# Altium PCB УШЯИ 758727.205-2.PcbDoc (part 2 of 3)
Units mm, origin at the board's own origin, x right, y up, seen from the top; angles counter-clockwise.
Board outline 230 x 150 mm, 2 copper layers (Top Layer, Bottom Layer), stack 1.57 mm thick; 340 components, 190 nets, 1058 pads, 246 vias.
Unrouted connection lines stored in the file: 2.
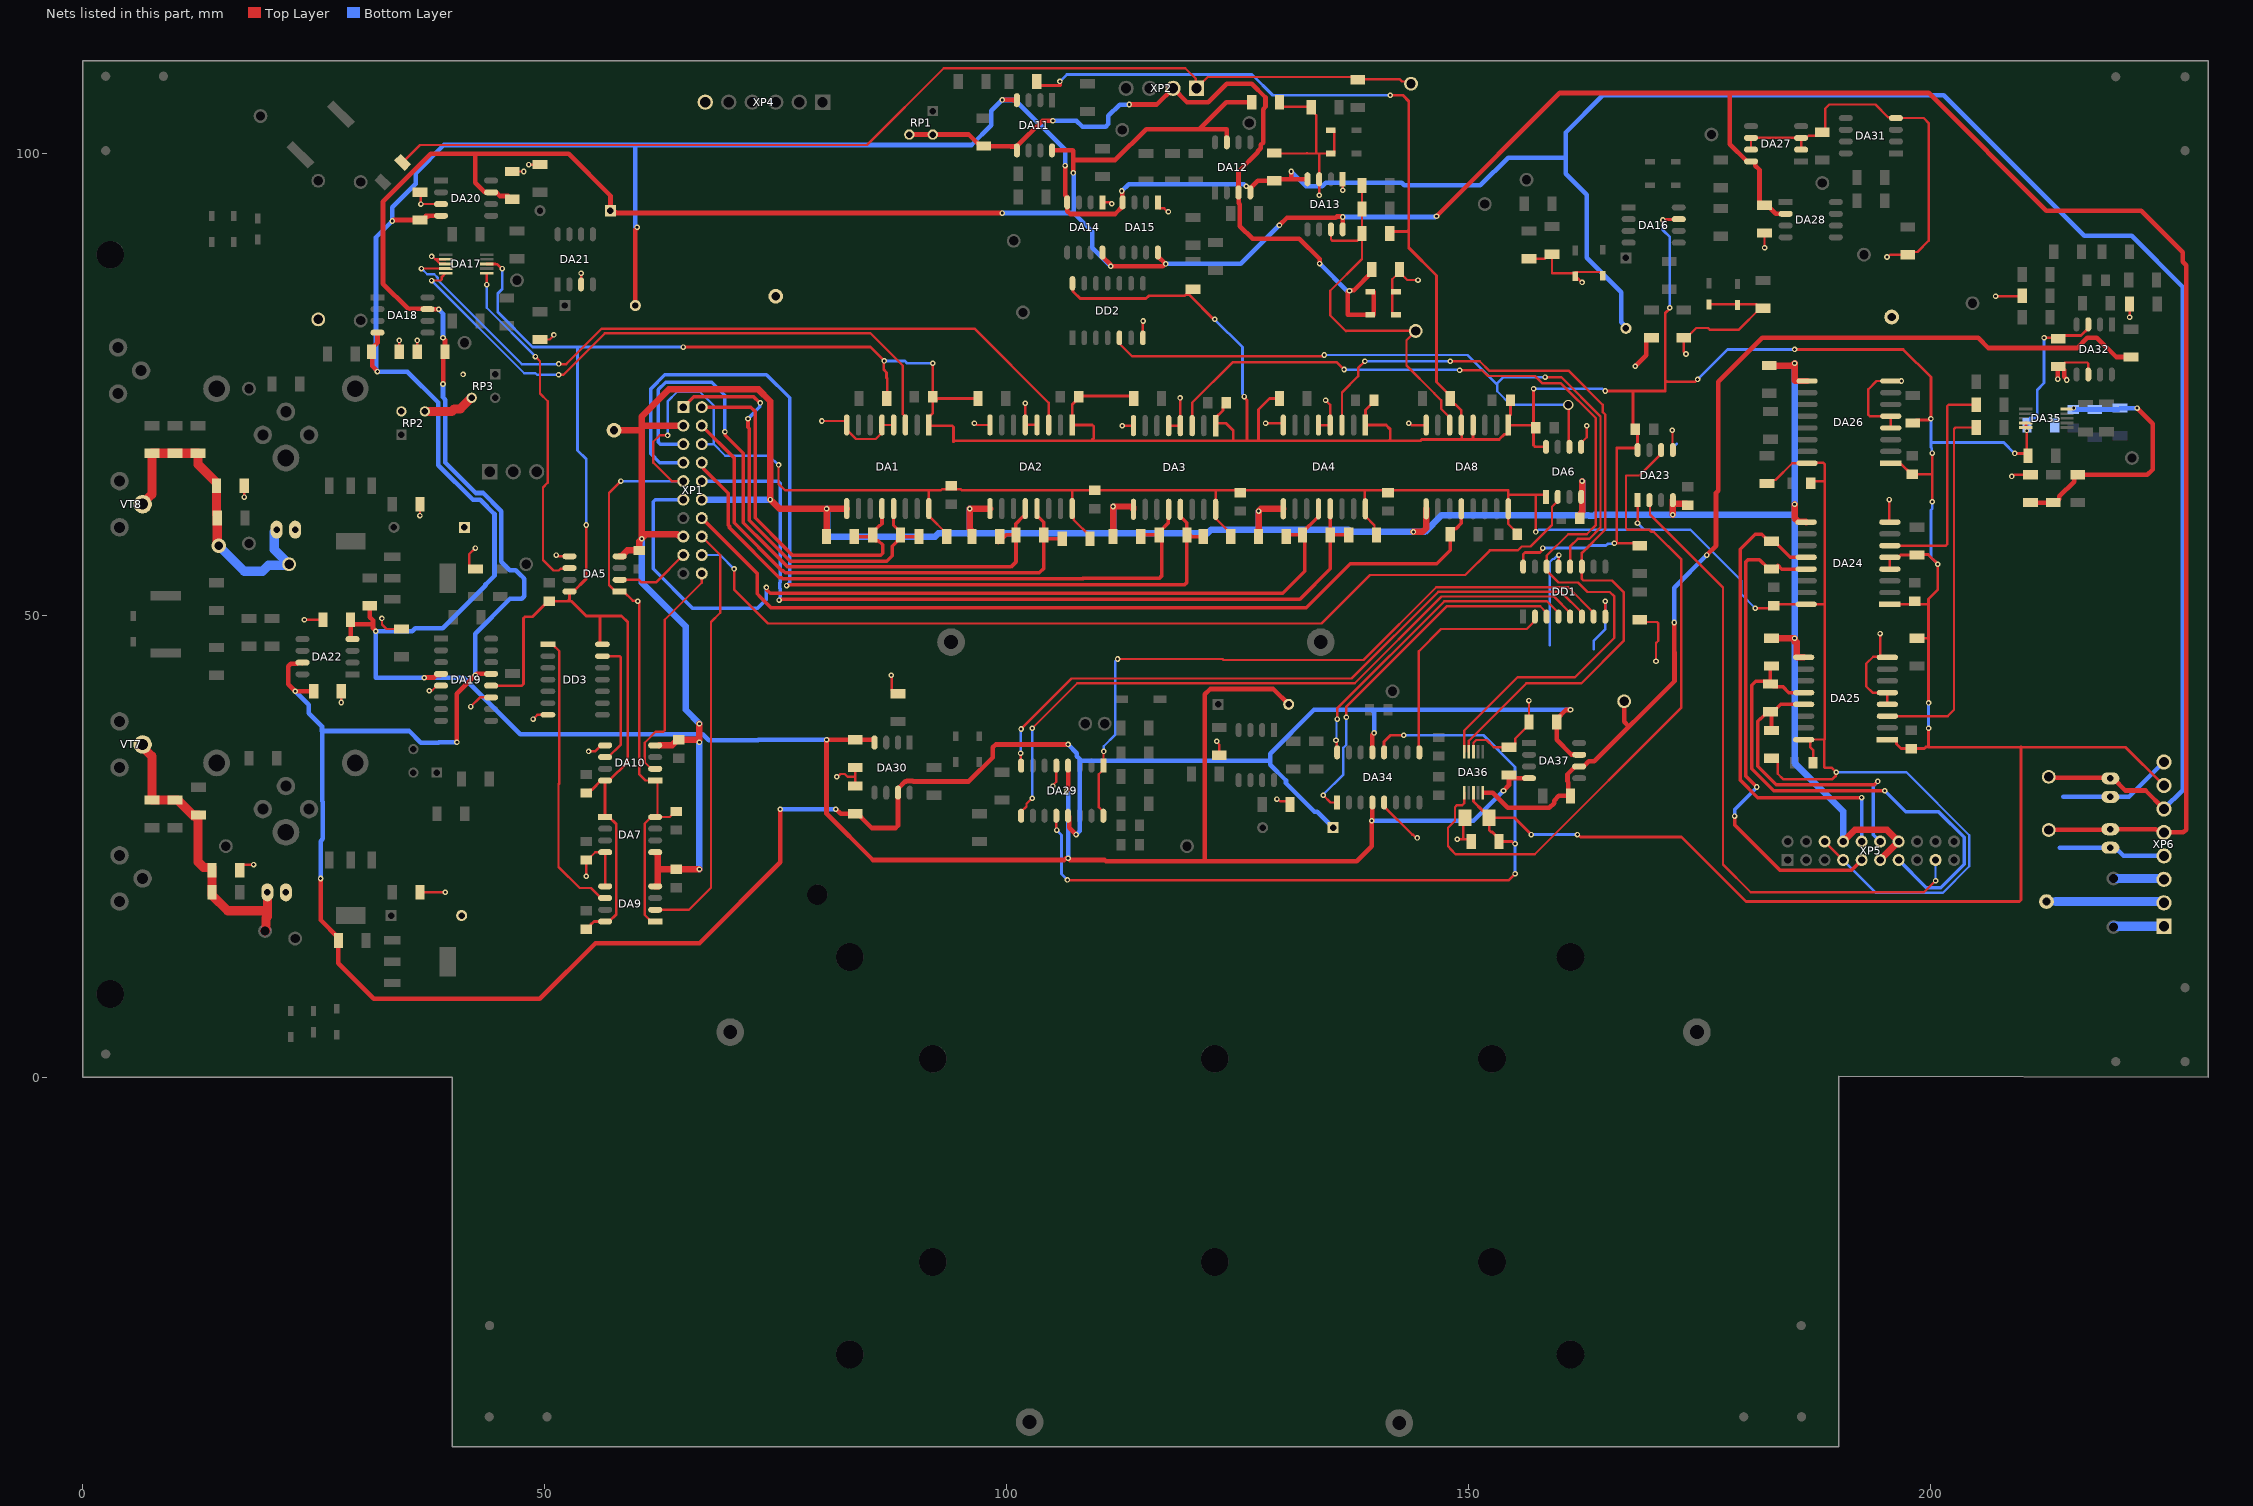
[diagram p2: the nets of this part, all layers, seen from the top]

## Via types
v1: diameter 0.6, hole 0.3, Top Layer to Bottom Layer, 241 vias
v2: diameter 0.5, hole 0.3, Top Layer to Bottom Layer, 3 vias
v3: diameter 1.1, hole 0.8, Top Layer to Bottom Layer, 1 vias
v4: diameter 1.6, hole 0.9, Top Layer to Bottom Layer, 1 vias

## Nets (pads, with @x,y where several pads share a name; then routed paths per layer and width w, separated by ;. In a path a pad name is that pad's centre, name@x,y a point inside that pad or via, vN(x,y) a via of type N, cw(c..) or ccw(c..) an arc to the next point about the centre after c; other vN are vias at no path point) (continued)
+3.3Vn: C1.2 C2.2 C3.2 C4.2 C11.1 C12.2 C53.2 C54.2 C55.2 DA1.16 DA2.16 DA3.16 DA4.16 DA5.1 DA6.1 DA7.8 DA8.16 DA9.1 DA10.1 DA23.1 DA24.16 DA25.16 DA26.16 R1.1 R3.1 R5.1 R7.1 R67.2 R68.2 XP1.6 XP1.9 XP5.6 XP5.7 | length 347.3
  Top Layer w0.254: v1(58.25,64.5) 56.967,63.217 56.967,53.252 57.669,52.55 DA5.1@58.106,52.55 58.544,52.55 59.528,51.566 60.009,51.566 v1(60.075,51.5) ; 60.25,32.75 60.905,32.095 DA10.1@61.962,32.095 ; 60.25,32.869 v1@60.25,51.5 ; DA9.1@61.962,16.845 61.525,16.845 60.823,17.547 60.823,27.453 61.395,28.026 DA7.8@61.974,28.026 ; DA7.8@61.962,28.155 DA7.8@62.212,28.155 ; DA10.1@62.014,32.095 62.212,31.897 DA7.8@62.212,28.155 ; v1(63.3,69.445) 62.445,69.445 61.75,68.75 61.75,66.5 63.75,64.5 XP1.9@65,64.5 ; C11.1@64.25,28.75 64.125,28.75 63.53,28.155 DA7.8@62.212,28.155 ; v1(75.309,66.25) 75.309,64.191 76,63.5 91.574,63.5 ; R1.1@93.5,58.5 93.5,58.8 91.574,60.726 DA1.16@91.574,61.523 91.574,63.5 ; C1.2@94,64 C1.2@94.373,63.627 ; 107,63.5 107.082,63.418 DA2.16@107.082,61.523 ; DA2.16@107.25,61.25 107.25,60.3 109,58.55 R3.1@109,58.25 ; DA3.16@122.6,61.444 122.6,63.4 122.5,63.5 ; DA3.16@122.663,61.413 122.663,60.387 124.25,58.8 R5.1@124.25,58.5 ; R7.1@140.25,58.5 139.797,58.953 139.797,59.703 138.81,60.69 DA4.16@138.81,61.5 138.75,61.56 138.75,63.5 ; C12.2@155.25,58.75 155.25,58.875 154.27,59.855 DA8.16@154.27,61.5 154.27,63.026 ; v1(157.25,59) 157.25,63 ; DA6.1@158.345,62.788 158.345,62.828 158.147,63.026 154.27,63.026 ; v1(168.25,59.952) 168.25,60 168.263,60.013 DA23.1@168.263,62.438 ; v1(181,50.75) 182.871,50.75 C53.2@183,50.879 ; R68.2@182.5,64.25 182.873,64.623 183.176,64.623 184.993,66.44 DA26.16@186.003,66.44 ; R67.2@182.75,34.5 183.05,34.5 183.423,34.127 183.423,32.827 184,32.25 189.357,32.25 189.684,32.576 189.684,32.934 v1(189.75,33) 189.248,33.502 189.246,33.5 188.5,33.5 188.47,33.53 188.47,36.53 DA25.16@186.81,36.53 ; C53.2@183,51 183.17,51.17 DA24.16@186.5,51.17 188.42,51.17 188.5,51.25 ; DA25.16@186.23,36.53 DA25.16@186.81,36.53 ; DA26.16@186.601,66.44 187.19,66.44 187.25,66.5 188.351,66.5 188.5,66.351 188.5,64.5 ; C55.2@187,64.25 187.25,64.5 188.5,64.5 ; C54.2@187.25,34 187.25,35.389 186.961,35.678 186.961,36.379 DA25.16@186.81,36.53 ; XP5.6@188.5,25.5 XP5.7@190.5,23.5 ; 188.5,36.53 188.5,51.25 ; 91.574,63.5 92.867,63.5 92.994,63.627 C1.2@94.373,63.627 ; C1.2@94.373,63.627 95.006,63.627 95.133,63.5 103.488,63.5 C2.2@109.5,63.5 122.5,63.5 ; 122.5,63.5 138.75,63.5 ; 138.75,63.5 154.25,63.5 154.27,63.48 154.27,63.026 ; 188.5,51.25 188.5,64.5
  Bottom Layer w0.254: v1(58.25,64.5) XP1.9@65,64.5 ; v1(63.3,69.445) 63.3,73.127 64.35,74.177 66.775,74.177 68.286,72.666 68.286,68.5 ; XP1.6@67,68.5 68.286,68.5 ; v1(75.309,66.25) 74.309,67.25 69.536,67.25 68.286,68.5 ; v1(157.25,59) 157.322,59 157.572,59.25 168.952,59.25 ; v1(168.25,59.952) 168.952,59.25 ; v1(181,50.75) 179.473,52.277 179.473,53.734 173.957,59.25 168.952,59.25 ; v1(189.75,33) 197.345,33 204.158,26.187 204.158,22.813 201.287,19.942 194.058,19.942 XP5.7@190.5,23.5
+5V: C5.2 C6.2 C7.2 C8.2 C13.1 C14.1 C16.2 C19.1 C20.1 C56.1 C57.2 C58.2 C59.2 C88.1 C94.2 C95.1 C97.1 DA1.1 DA2.1 DA3.1 DA4.1 DA5.8 DA6.8 DA7.1 DA8.1 DA8.4 DA8.5 DA9.8 DA10.8 DA16.7 DA17.8 DA19.12 DA23.8 DA24.1 DA24.4 DA24.5 DA25.1 DA26.1 DA29.12 DA32.3 DA34.12 DA35.9 DA35.10 DA36.8 DD1.16 DD2.14 DD3.14 R13.1 R14.1 R15.1 R16.1 R18.1 R19.2 R27.2 R32.2 R33.1 R72.1 R73.1 R74.1 R101.2 XP6.7 | length 795.3
  Top Layer w0.3: DA17.8@43.725,88 44.666,88 44.693,87.973 44.852,87.973 45.325,87.5 v1(45.406,87.5) ; DA19.12@44.212,42.365 47.53,42.365 47.71,42.544 47.71,44.334 47.706,44.338 47.706,49.649 47.882,49.825 48.7,49.825 50.375,51.5 C13.1@50.5,51.5 52.5,51.5 ; DA5.8@52.682,52.55 52.682,51.682 52.5,51.5 ; DA5.8@52.75,52.5 53.07,52.5 54.5,53.93 v1(54.5,59.75) ; C19.1@54.5,16 54.625,16 54.975,16.35 54.975,16.494 55.326,16.845 DA9.8@56.538,16.845 56.975,16.845 57.75,17.619 57.75,27.381 56.975,28.155 DA7.1@56.538,28.155 56.538,31.595 DA10.8@56.538,32.095 ; C20.1@54.5,30.75 54.625,30.75 C20.1@54.75,30.875 ; C20.1@54.75,30.75 C20.1@54.75,30.875 ; 56,49.75 56,46.969 56.139,46.83 DD3.14@56.25,46.83 ; v1(65,79) 85.25,79 v1(86.75,77.5) 86.693,77.443 86.693,76.557 87,76.25 87,75.669 87.069,75.599 R13.1@87.069,72.782 ; DA1.1@91.5,70.75 91.5,71.364 92,71.864 C5.2@92,73.602 v1(92,77.25) ; DA1.1@91.574,70.579 91.574,70.859 91.715,71 91.715,70.5 94.074,70.5 94.25,70.324 94.25,68.75 ; DA1.1@91.628,70.579 DA1.1@91.628,70.75 ; C5.2@92.414,73.257 92.584,73.427 R14.1@96.898,73.427 ; 94.25,68.865 126,68.865 ; R19.2@103.305,107.3 105.805,107.3 105.805,107.695 v1(105.75,107.75) ; DA29.12@105.365,28.288 105.365,26.793 v1(105.416,26.742) ; v1(106.566,21.346) 106.612,21.3 154.3,21.3 v1(155,22) ; DD2.14@107.166,85.45 107.166,85.031 107.948,84.25 115.076,84.25 115.376,84.55 119.254,84.55 119.402,84.699 119.702,84.699 v1@122.497,81.904 ; 109.25,69 109.421,69.171 109.421,70.404 109.245,70.579 DA2.1@107.082,70.579 107.082,72.768 107.791,73.477 107.791,73.705 113.3,73.705 113.577,73.427 R15.1@113.741,73.427 ; C7.2@123.75,73 C7.2@123.75,73.125 ; C7.2@124,73 123.875,73 123.4,72.525 123.4,72.158 122.6,71.358 DA3.1@122.6,70.5 122.6,70.609 122.741,70.75 123.75,70.75 124.5,70 124.5,69 ; v1@125.75,73.5 126,73.25 126,68.865 ; R16.1@129.499,73.427 128.427,73.427 127.25,72.25 127.25,68.865 ; DA4.1@138.81,70.556 141.056,70.556 141.5,70.112 141.5,69 141.365,68.865 127.25,68.865 ; DA4.1@138.81,71 138.81,72.185 139.625,73 C8.2@140,73 ; DA34.12@140.832,35.15 140.832,36.301 141.532,37 v1(142.952,37) ; R27.2@141.446,91.299 141.647,91.5 143.324,91.5 143.5,91.676 ; 141.5,68.865 144.75,68.865 144.885,69 149.25,69 ; v1(141.5,106.25) 142.855,106.25 143.5,105.605 143.5,91.676 ; R18.1@148,73 148,73.708 146.5,75.208 146.5,86.75 143.5,89.75 143.5,91.676 ; R18.1@148,73.108 148.331,72.777 148.568,72.777 149.19,72.155 DA8.5@149.19,70.556 149.244,70.502 149.244,69.006 149.25,69 ; DA8.4@150.46,70.556 150.46,69.04 150.5,69 ; DA36.8@150.5,30.775 150.5,29.834 151.501,28.833 151.65,28.833 152.2,28.283 C95.1@152.2,28.083 ; DA8.1@154.25,70.75 154.25,71.394 154.5,71.644 C16.2@154.5,73.25 ; DA8.1@154.257,70.543 155.25,70.543 ; DA8.1@154.27,70.556 154.27,69.698 154.129,69.557 153.836,69.557 153.279,69 150.5,69 ; v1(155,25.25) 154.919,25.25 154.669,25.5 C97.1@153.25,25.5 153.25,25.8 152.531,26.519 152.412,26.519 152.2,26.731 C95.1@152.2,28.083 ; 155.263,70.543 C14.1@157,70.543 ; DD1.16@155.88,55.25 155.88,56.549 156.1,56.768 157.674,56.768 157.85,56.944 157.85,57.019 158,57.169 v1(158,57.25) ; v1(156.75,26.25) 154.917,28.083 C95.1@152.2,28.083 ; v1(157,74.5) C14.1@157,70.543 ; C14.1@157.25,70.5 157.207,70.543 C14.1@157,70.543 ; DA6.8@158.345,68.212 157.176,68.212 157,68.388 C14.1@157,70.543 ; v1(161.75,26.25) 161.826,26.25 162.076,26 173,26 180,19 209.574,19 209.75,19.176 209.75,35.75 ; v1(164.75,74.25) 167.75,74.25 ; v1(165.752,57.775) v1@166,57.775 ; 166,68.075 v1@166,57.775 ; 166.025,68.075 168.101,68.075 DA23.8@168.263,67.913 ; C56.1@167.9,70.175 C56.1@167.925,70.175 ; C56.1@168,70.125 167.75,70.375 167.75,74.25 ; C56.1@168,70.175 168.263,69.912 DA23.8@168.263,67.913 ; DA23.8@168.263,67.862 DA23.8@168.263,67.913 ; R33.1@168.5,57.5 168.225,57.775 v1@166,57.775 ; v1(171,92.75) 171.046,92.796 172.665,92.796 DA16.7@172.712,92.843 ; v1(171.75,83.25) 171.75,83.174 171.242,82.666 171.242,75.434 ; v1(174.75,75.5) 174.508,75.258 171.418,75.258 171.242,75.434 ; v1(185.25,78.75) 197,78.75 200,75.75 v1(200,71.25) 199.919,71.25 199.794,71.125 198.375,71.125 R74.1@198.025,70.775 ; DA24.1@195.556,51.17 199.67,51.17 199.75,51.25 ; DA24.4@195.556,54.98 DA24.5@195.556,56.25 196.49,56.25 196.74,56.5 R72.1@198.5,56.5 198.55,56.55 199.7,56.55 v1(200.75,55.5) 200.75,52.75 199.75,51.75 199.75,51.25 ; DA26.1@195.657,66.44 196.515,66.44 196.656,66.299 196.826,66.299 197.875,65.25 200.125,65.25 200.15,65.275 ; DA25.1@195.75,36.5 196.174,36.5 196.285,36.389 196.285,36.04 196.775,35.55 C58.2@197.85,35.55 199.3,35.55 199.5,35.75 199.75,35.75 v1(199.75,37.75) ; R73.1@198.5,47.5 199.75,47.5 ; 199.75,35.7 221.076,35.7 225,31.776 XP6.7@225,31.75 ; v1(199.75,40.5) 199.75,47.5 ; v1(200.15,62.275) 200.15,65.25 ; v1(209.064,67.5) R101.2@210.25,67.5 ; DA35.9@210.275,70.796 DA35.10@210.275,70.296 210.375,70.296 v2(210.375,69.95) 210.375,67.625 R101.2@210.345,67.595 ; v1(212.25,80) 213.666,80 C88.1@213.768,79.897 214.118,80.247 216.252,80.247 217.029,81.024 DA32.3@217.029,81.462 ; 52.5,51.5 52.9,51.5 54.5,49.9 58.324,49.9 59,49.224 59,34.12 56.975,32.095 DA10.8@56.538,32.095 ; C20.1@54.75,30.875 54.975,31.1 55.105,31.1 56.1,32.095 DA10.8@56.538,32.095 ; 126,68.865 127.25,68.865 ; 149.25,69 150.5,69 ; 167.75,74.25 171.25,74.25 171.242,74.258 171.242,75.434 ; 199.75,47.5 199.75,51.25 ; 200.15,65.25 v1(200.15,67.525) 200.15,65.25 ; R101.2@210.25,67.5 R101.2@210.5,67.25 210.5,67.441 R101.2@210.345,67.595 ; R101.2@210.25,67.5 R101.2@210.345,67.595
  Bottom Layer w0.3: v1(45.406,87.5) 45.406,85.298 44.925,84.817 44.925,82.796 48.701,79.02 52.624,79.02 52.644,79 v1(65,79) ; 53.555,78.894 53.555,67.815 54.5,66.87 v1(54.5,59.75) ; v1(86.75,77.5) 88.971,77.5 89.221,77.25 v1(92,77.25) ; v1(105.416,26.742) 105.416,26.72 105.935,26.201 105.935,21.977 v1(106.566,21.346) ; v1(105.75,107.75) 106.5,108.5 126.528,108.5 128.778,106.25 v1(141.5,106.25) ; v1(122.5,82) 125.5,79 125.5,73.93 125.701,73.729 v1(125.701,73.648) ; v1(142.952,37) 151.571,37 155,33.571 v1(155,25.25) v1(155,22) ; v1(156.75,26.25) v1(161.75,26.25) ; v1(157,74.5) 164.419,74.5 164.669,74.25 v1(164.75,74.25) ; v1(158,57.25) 162.779,57.25 163.054,57.525 164.852,57.525 165.045,57.718 165.695,57.718 v1(165.752,57.775) ; v1(171,92.75) 171,91.646 171.75,90.896 v1(171.75,83.25) ; v1(174.75,75.5) 178,78.75 v1(185.25,78.75) ; v1(199.75,37.75) v1(199.75,40.5) ; v1(200,71.25) 200,68.689 ; v1(200.15,62.275) 200.15,61.525 200,61.375 200,56.25 v1(200.75,55.5) ; v1(200.15,67.525) 200.093,67.582 200.093,68.032 200,68.125 200,68.689 ; v1(209.064,67.5) 207.875,68.689 200,68.689 ; C94.2@210.4,70.55 210.75,70.9 210.75,71.326 211.324,71.326 211.5,71.502 211.5,74.373 212.25,75.123 v1(212.25,80)
+15V: C26.2 C35.1 C42.1 C46.2 C60.1 C67.2 C79.2 C98.1 DA11.8 DA12.7 DA13.8 DA14.8 DA15.8 DA18.7 DA19.13 DA20.7 DA22.7 DA27.8 DA28.2 DA29.13 DA30.7 DA34.13 DA37.7 KT20.1 R50.1 VD10.1 VD25.1 XP6.5 | length 677.9
  Top Layer w0.5: 23.48,41.75 v1(23,41.75) 23,41.777 22.25,42.527 22.25,44.457 22.543,44.75 23.195,44.75 23.281,44.836 23.709,44.836 DA22.7@23.75,44.796 ; 23.48,41.77 C42.1@25,41.77 ; v1(25.75,21.5) 25.769,21.481 25.769,17.009 27.678,15.1 R50.1@27.678,14.8 27.678,12.322 31.525,8.475 49.475,8.475 55.5,14.5 66.75,14.5 75.5,23.25 v1(75.5,29) ; v1(38.55,83.104) DA18.7@37.33,83.104 37.301,83.133 35.217,83.133 32.5,85.849 32.5,94.719 37.681,99.9 42.5,99.9 ; v1(39,75.005) 39.019,75.025 39.019,78.307 C35.1@39.212,78.5 39.212,79.788 v1(39,80) ; v1(40.5,36.25) 40.5,41.5 v1(42.5,43.5) 42.527,43.5 42.662,43.635 DA19.13@43.931,43.635 ; C46.2@46.5,95 46.5,94.926 46.076,95.35 45.139,95.35 44.744,95.745 DA20.7@44.212,95.745 44.183,95.774 43.516,95.774 42.5,96.79 42.5,99.9 ; v1(81.5,29) 81.527,29 82.026,28.501 C79.2@83.595,28.501 83.895,28.501 84.245,28.151 84.245,28.1 85.383,26.962 87.962,26.962 88.23,27.23 DA30.7@88.23,31.226 ; DA30.7@88.23,30.789 DA30.7@88.23,31.226 ; v1(99.5,93.506) 57.764,93.506 57.647,93.622 57.255,93.622 VD10.1@57.121,93.756 57.121,95.379 52.6,99.9 42.5,99.9 ; DA11.8@104.905,100.288 107.144,100.288 107.196,100.236 107.196,99.25 ; v1(106.635,36) 98.793,36 98.5,35.707 98.5,34.594 95.906,32 89.893,32 89.842,32.051 89.158,32.051 89.107,32 89.004,32 DA30.7@88.23,31.226 ; DA29.13@106.75,28.25 106.75,27 v1(107.5,26.25) ; v1(107.196,97.846) 107.196,99.25 ; DA14.8@110.351,88.839 110.4,88.79 110.4,88.75 111.231,87.919 111.231,87.769 v1(111.25,87.75) 111.269,87.731 116.899,87.731 117.168,88 v1@117.172,88 ; DA15.8@116.351,88.822 v1@117.172,88 ; v1(117.196,88) v1@117.172,88 ; DA12.7@123.811,101.16 123.811,102.573 120.823,102.573 ; C26.2@126.5,105.5 123.75,105.5 120.823,102.573 ; v1(129.5,92.174) 130.325,92.999 135.585,92.999 135.716,93.129 136.268,93.129 136.323,93.074 v1(136.351,93.074) ; DA13.8@136.351,91.736 v1(136.351,93.074) ; v1@136.351,93.129 v1(136.351,93.074) ; DA34.13@139.5,35.5 139.562,35.562 139.562,37.035 139.75,37.223 v1(139.75,37.25) ; v1(146.5,93.162) 159.838,106.5 178.25,106.5 ; C98.1@159.5,38.437 159.5,36.5 161.084,34.916 161.909,34.916 DA37.7@161.937,34.888 ; C98.1@159.5,38.75 159.513,38.75 160.493,39.731 160.981,39.731 v1(161,39.75) ; C67.2@181.75,94.5 181.545,94.5 181.45,94.595 181.45,98.183 181.004,98.629 181.004,99.026 180.935,99.095 DA27.8@180.538,99.095 180.1,99.095 178.25,100.946 178.25,106.5 ; C67.2@182.3,94.345 183.197,93.448 184.254,93.448 DA28.2@184.283,93.42 ; KT20.1@212.5,26.75 212.538,26.788 219.376,26.788 C60.1@219.415,26.827 224.341,26.827 224.461,26.707 224.989,26.707 XP6.5@225.209,26.487 227.316,26.487 227.609,26.78 227.609,87.873 227.25,88.232 227.25,89.25 222.75,93.75 212.5,93.75 199.75,106.5 178.25,106.5 ; 107.196,99.25 111.758,99.25 115.081,102.573 120.823,102.573
  Bottom Layer w0.5: v1(23,41.75) 24.46,40.29 24.46,39.391 25.9,37.95 25.9,37.456 25.95,37.456 ; v1(25.75,21.5) 25.75,25.538 26,25.788 26,29.8 25.95,29.85 25.95,37.456 ; v1(38.55,83.104) 38.55,83.077 39,82.627 v1(39,80) ; v1(39,75.005) 39,73.561 39.25,73.311 39.25,66.514 42.551,63.213 43.347,63.213 45.316,61.245 45.316,55.793 46.242,54.867 46.865,54.867 47.482,54.25 47.492,54.25 47.8,53.942 47.8,52.043 47.507,51.75 46.25,51.75 42.5,48 v1(42.5,43.5) ; v1(40.5,36.25) 38.561,36.25 38.511,36.2 36.599,36.2 35.343,37.456 25.95,37.456 ; v1(75.5,29) v1(81.5,29) ; v1(99.5,93.506) 107.241,93.506 ; v1(106.635,36) 107.581,35.054 107.581,34.729 107.884,34.426 ; v1(107.196,97.846) 107.241,97.801 107.241,93.506 ; v1(107.5,26.25) 107.884,26.634 107.884,34.426 ; v1(111.25,87.75) 109.236,89.764 109.236,91.51 107.241,93.506 ; v1(117.196,88) 125.326,88 v1(129.5,92.174) ; VD25.1@135.313,27 133.612,28.701 133.299,28.701 130.211,31.789 130.211,32.102 128.511,33.802 128.511,34.25 ; v1(136.351,93.074) 146.385,93.074 146.473,93.162 v1(146.5,93.162) ; v1(139.75,37.25) 139.75,39.5 139.5,39.75 ; v1(161,39.75) 139.5,39.75 ; 107.884,34.426 108.06,34.25 128.511,34.25 ; 128.511,34.25 128.511,35.011 133.25,39.75 139.5,39.75
+55V: C50.2 C63.1 R53.1 R57.2 R60.2 R62.2 VT7.2 XP6.1 | length 38.9
  Top Layer w1: VT7.2@6.5,36 6.5,35.729 7.5,34.729 R62.2@7.5,30 R60.2@10.3,30 ; R60.2@10,30 R60.2@10.3,30 ; R57.2@12.5,28.375 12.5,23.286 13.086,22.7 14,22.7 14,22.1 R53.1@14,20 14,19.7 15.7,18 20,18 ; R57.2@12.55,28.375 12.463,28.375 12.25,28.375 12.088,28.212 R60.2@10.3,30 ; 19.75,15.82 19.846,15.915 19.846,17.224 20,17.379 20,18 ; C63.1@20,20 20,18
  Bottom Layer w1: 219.75,16.327 XP6.1@225.209,16.327
-15V: C27.2 C36.2 C43.1 C47.2 C62.2 C80.2 C99.2 DA11.4 DA12.4 DA13.4 DA14.4 DA15.4 DA18.4 DA19.4 DA20.4 DA22.4 DA29.4 DA30.4 DA34.4 DA37.4 KT21.1 R52.1 VD7.2 VD11.2 VD26.2 XP6.6 | length 619.1
  Top Layer w0.5: C43.1@29,49.5 C43.1@29,49.2 ; DA22.4@29.212,47.405 29.162,47.405 29,47.567 C43.1@29,49.2 ; R52.1@31.072,51 31.072,49.777 31.42,49.43 31.42,49 ; v1(31.727,48.25) 31.727,48.331 31.515,48.543 31.515,48.557 31.42,48.557 31.42,49 ; v1(31.906,76.35) 31.906,76.377 31.333,76.95 31.333,78.421 C36.2@31.254,78.5 31.254,78.8 31.906,79.452 DA18.4@31.906,80.564 ; v1(33.5,92.645) 33.527,92.645 33.627,92.745 C47.2@36.5,92.745 ; C47.2@36.8,92.745 C47.2@37.15,93.095 ; v1(36.981,43.231) 37,43.25 38.027,43.25 38.277,43.5 DA19.4@38.75,43.5 ; DA20.4@38.788,93.205 37.46,93.205 ; VD11.2@59.813,83.5 59.813,91.692 60,91.879 v1(60,91.974) ; v1(80.5,36.5) 80.5,28.525 85.525,23.5 106.227,23.5 106.385,23.658 106.616,23.658 v1(106.635,23.677) 106.662,23.677 106.839,23.5 110.613,23.5 110.74,23.373 121.373,23.373 ; v1(80.5,36.5) C80.2@83.595,36.501 85.528,36.501 85.69,36.339 DA30.4@85.69,36.213 ; v1(99.5,105.75) 100.71,105.75 100.8,105.66 101.043,105.66 DA11.4@101.095,105.712 ; v1(106.311,98.646) 106.311,95.422 106.541,95.193 DA14.4@106.541,94.66 106.544,94.657 106.544,93.706 106.852,93.398 111.716,93.398 112.541,94.223 DA15.4@112.541,94.66 112.512,94.689 112.512,95.788 112.437,95.863 v1(112.437,95.89) ; v1(106.5,31) 106.5,31.027 106.635,31.162 DA29.4@106.635,33.712 ; DA12.4@126.351,96.174 127.177,97 C27.2@128.946,97 129.106,97.16 130.782,97.16 ; VD26.2@130.503,40.347 128.85,42 121.999,42 121.417,41.418 121.417,23.417 121.373,23.373 ; v1(130.782,98) 130.782,97.16 ; DA13.4@132.541,97.16 130.782,97.16 ; DA34.4@139.591,29.409 139.562,29.38 139.562,27.84 139.5,27.777 v1(139.5,27.75) 139.5,24.996 137.877,23.373 121.373,23.373 ; v1(153.75,31) 154.34,31.59 C99.2@154.34,32.706 154.69,32.356 155.292,32.356 155.301,32.348 DA37.4@156.513,32.348 ; KT21.1@212.75,32.5 212.837,32.413 219.328,32.413 C62.2@219.415,32.327 219.74,32.327 221.05,31.017 223.219,31.017 XP6.6@225.209,29.027 ; C43.1@29,49.2 29.2,49 31.42,49 ; C47.2@37.15,93.095 37.15,93.205 37.46,93.205 ; C47.2@37.15,93.095 37.35,93.095 37.46,93.205
  Bottom Layer w0.5: v1@59.813,91.974 59.813,100.676 60,100.863 ; v1(80.5,36.5) 73.127,36.5 73.088,36.461 67.742,36.461 67.102,37.1 47.361,37.1 41.229,43.231 v1(36.981,43.231) 35.073,43.231 35.049,43.207 31.751,43.207 31.727,43.231 v1(31.727,48.25) 35.672,48.25 35.992,48.57 38.961,48.57 43.602,53.211 43.602,53.313 44.566,54.277 44.566,60.934 43.037,62.463 42.24,62.463 38.5,66.203 38.5,73 35.15,76.35 v1(31.906,76.35) 31.906,76.377 31.75,76.533 31.75,90.895 v1(33.5,92.645) 33.5,94.122 36.031,96.653 36.031,97.81 39.084,100.863 60,100.863 ; v1(106.311,98.646) 106.311,100.335 100.915,105.731 99.519,105.731 v1(99.5,105.75) 98.328,104.578 98.328,103.002 96.188,100.863 60,100.863 ; v1(106.5,31) 106.5,30.973 106.635,30.838 v1(106.635,23.677) ; v1(112.437,95.89) 113.185,96.638 125.666,96.638 125.896,96.408 v1(125.924,96.408) ; v1(130.782,98) 132.378,96.404 134.139,96.404 134.506,96.771 142.743,96.771 143.013,96.5 151.25,96.5 154.25,99.5 160.472,99.5 ; v1(139.5,27.75) 150.5,27.75 v1(153.75,31) ; VD7.2@167,81.032 167,81.175 166.5,81.675 166.5,84.92 162.75,88.67 162.75,95.5 160.472,97.778 160.472,99.5 ; XP6.6@225.209,29.027 227.25,31.068 227.25,85.504 221.726,91.028 216.609,91.028 201.387,106.25 164.5,106.25 160.472,102.222 160.472,99.5
-55V: 3.1 C51.1 C61.2 R56.1 R58.1 R61.1 R63.1 VT8.2 XP6.3 | length 41.2
  Top Layer w1: VT8.2@6.357,61.857 6.357,61.942 7.5,63.086 R61.1@7.5,67.5 R63.1@10,67.5 R58.1@12.5,67.5 12.5,66.3 14.5,64.3 C51.1@14.5,64 14.5,60.873 14.573,60.8 R56.1@14.573,60.5 14.573,57.834 14.744,57.662 v4(14.744,57.5) ; XP6.3@225.169,21.367 XP6.3@225.209,21.407
  Bottom Layer w1: v4(14.744,57.5) 17.494,54.75 19.465,54.75 20.119,55.404 22.254,55.404 3.1@22.35,55.5 20.75,57.1 20.75,59 C61.2@21,59.25 ; 219.75,21.5 225.116,21.5 XP6.3@225.209,21.407
ADC: C96.2 DA36.10 DA37.6 KT28.1 R90.1 | length 114.1
  Top Layer w0.5: 151.75,30.775 152.575,30.775 154.213,29.137 158.707,29.137 159.229,29.659 159.229,29.916 159.75,30.437 C96.2@161,30.437 160.75,30.687 160.75,31.931 160.675,32.006 160.675,32.793 DA37.6@161.5,33.617 ; DA37.6@161.937,33.618 162.415,33.618 162.964,34.166 163.585,34.166 172.25,42.831 172.25,45.99 172.225,46.015 v1(172.225,49.2) ; KT28.1@166.804,40.673 166.804,38.446 167.25,38 ; v1(175.75,56.5) 176.75,57.5 176.75,63.223 177,63.473 177,75.25 181.75,80 205.12,80 206.223,78.897 215.821,78.897 216.924,80 217.964,80 220.034,77.93 R90.1@221.663,77.93
  Bottom Layer w0.5: v1(172.225,49.2) 172.225,52.975 v1(175.75,56.5)
CLK_ADU: DA25.3 R102.2 | length 40.3
  Top Layer w0.254: DA25.3@195.286,39.07 201.82,39.07 202.5,39.75 202.5,70.147 202.649,70.296 R102.2@204.895,70.296
CLK_ADU+: DA25.12 R65.2 R70.1 XP5.13 | length 55.8
  Top Layer w0.381: R65.2@183,44.5 182.937,44.5 182.627,44.191 R70.1@182.627,42.53 ; DA25.12@186.23,41.61 184.622,41.61 183.999,42.234 182.923,42.234 R70.1@182.627,42.53 ; v1(195,31) 194.991,30.99 183.01,30.99 180.615,33.385 180.615,42.39 181.065,42.84 182.318,42.84 R70.1@182.627,42.53
  Bottom Layer w0.381: v1(195,31) 197.281,28.719 200.823,28.719 203.591,25.952 203.591,23.048 201.052,20.51 199.49,20.51 XP5.13@196.5,23.5
CLK_ADU-: DA25.13 R67.1 R70.2 XP5.12 | length 33.7
  Top Layer w0.381: R70.2@182.5,39.5 182.75,39.25 R67.1@182.75,37.5 ; DA25.13@186.23,40.34 183.737,40.34 182.927,39.53 182.327,39.53 181.596,38.799 181.519,38.799 181.25,38.53 181.25,33.642 183.267,31.625 193.875,31.625 v1(194.25,32)
  Bottom Layer w0.381: v1(194.25,32) 193.75,31.5 193.75,26.25 XP5.12@194.5,25.5
CLK_DA1: DA2.3 DA17.4 | length 82.2
  Top Layer w0.254: v1(36.663,87.5) DA17.4@39.275,87.5 ; v1(51.525,77.175) 51.546,77.154 52.334,77.154 56.18,81 96.5,81 104.542,72.958 DA2.3@104.542,70.579
  Bottom Layer w0.254: v1(36.663,87.5) 37.286,86.877 38.048,86.877 38.445,86.48 38.445,86.236 47.526,77.154 51.504,77.154 v1(51.525,77.175)
CLK_DA1+: DA2.12 R4.2 R10.1 XP1.5 | length 71.3
  Top Layer w0.381: v1(69.5,69.85) 69.542,69.808 69.542,69.458 71.5,67.5 71.5,60 74,57.5 76.294,55.206 100.456,55.206 101,55.75 R10.1@101,58.5 ; R4.2@99.099,57.847 99.922,58.67 R10.1@100.994,58.67 100.994,59.893 101.728,60.627 101.909,60.627 102.002,60.72 DA2.12@102.002,61.523
  Bottom Layer w0.381: XP1.5@65,68.5 62.523,68.5 62.3,68.723 62.3,74.408 63.094,75.201 68.076,75.201 69.5,73.777 v1(69.5,69.85)
CLK_DA1-: DA2.13 R3.2 R10.2 XP1.4 | length 56.7
  Top Layer w0.381: XP1.4@67,70.5 70.5,67 70.5,60 75.722,54.778 75.824,54.778 76.031,54.571 103.527,54.571 103.994,55.038 103.994,58.494 R10.2@104,58.5 ; DA2.13@103.272,61.523 103.272,60.72 103.365,60.627 103.409,60.627 103.994,60.042 R10.2@103.994,58.67 ; R10.2@103.994,58.559 104.303,58.25 R3.2@106,58.25
CLK_RgDU: DA4.3 DA36.4 DD1.11 | length 88.5
  Top Layer w0.254: DA4.3@136.27,70.556 136.27,74.086 138.02,75.836 138.02,76.738 v1(138.75,77.468) ; v1(148,77.468) 151.18,77.468 152.221,76.427 160.823,76.427 164.5,72.75 164.5,71.963 164.754,71.709 164.754,59.254 162.23,56.73 DD1.11@162.23,55.25 162.23,53.899 162.379,53.75 165.5,53.75 166.75,52.5 166.75,47.2 162.176,42.626 156.229,42.626 150.004,36.401 150.004,36.36 149.973,36.329 149.973,35.252 DA36.4@150,35.225
  Bottom Layer w0.254: v1(138.75,77.468) v1(148,77.468)
CLK_RgDU+: DA4.12 R8.2 R12.1 XP1.11 | length 95.4
  Top Layer w0.381: v1(74,53) 74.042,52.958 74.042,52.708 74.389,52.361 75.052,52.361 75.061,52.369 75.675,52.369 75.683,52.361 129.861,52.361 132.25,54.75 132.25,58.42 R12.1@132,58.67 ; R8.2@130.25,58.5 130.42,58.67 R12.1@132,58.67 ; DA4.12@133.73,61.5 133.73,60.697 133.637,60.604 133.633,60.604 132,58.97 R12.1@132,58.67
  Bottom Layer w0.381: XP1.11@65,62.5 61.973,62.5 61.75,62.277 61.75,55 65.99,50.76 73.032,50.76 74,51.728 v1(74,53)
CLK_RgDU-: DA4.13 R7.2 R12.2 XP1.10 | length 90.8
  Top Layer w0.381: v1(75.368,51.629) 75.41,51.671 75.565,51.671 75.619,51.726 131.726,51.726 135,55 135,56.67 ; 135,56.75 R12.2@135,58.67 ; DA4.13@135,61.5 R12.2@135,58.67 ; R7.2@137,58.67 R12.2@135,58.67
  Bottom Layer w0.381: XP1.10@67,64.5 75.277,64.5 75.5,64.277 75.5,53.572 75.434,53.506 75.434,52.893 75.5,52.827 75.5,51.82 75.368,51.688 v1(75.368,51.629)
DAT_ADU: DA24.6 R103.2 | length 24.4
  Top Layer w0.254: DA24.6@195.556,57.52 198.353,57.52 198.373,57.5 201.601,57.5 201.75,57.649 201.75,72.601 201.899,72.75 R103.2@204.895,72.75
DAT_ADU+: DA24.12 R69.1 XP5.10 | length 51.9
  Top Layer w0.381: R69.1@182.45,58 181.7,58.75 180.977,58.75 179.349,57.122 179.349,32.151 181.25,30.25 v1(192.5,30.25) ; R69.1@183,57.75 183.3,57.75 183.36,57.69 183.36,57.67 184.78,56.25 DA24.12@186.5,56.25
  Bottom Layer w0.381: XP5.10@192.5,25.5 v1(192.5,30.25)
DAT_ADU-: DA24.13 R69.2 XP5.9 | length 53.5
  Top Layer w0.381: v1(178.75,28.25) 178.75,27.327 183.668,22.409 191.41,22.409 XP5.9@192.5,23.5 ; v1(181.149,31.399) 179.984,32.563 179.984,55.777 180.207,56 181.45,56 182.45,55 R69.2@182.75,55 183.05,55 183.446,55.396 183.863,54.98 DA24.13@186.5,54.98
  Bottom Layer w0.381: v1(178.75,28.25) 178.75,28.941 181.149,31.339 v1(181.149,31.399)
DAT_DA1: DA1.3 DA17.5 | length 67
  Top Layer w0.254: v1(37.768,86.2) 38.726,86.2 38.874,86.349 38.874,86.599 DA17.5@39.275,87 ; v1(51.5,76) 52.023,76 56.519,80.496 85.254,80.496 88.743,77.007 88.743,71.75 89.034,71.459 DA1.3@89.034,70.579
  Bottom Layer w0.254: v1(37.768,86.2) 47.791,76.177 48.997,76.177 49.174,76 v1(51.5,76)
DAT_DA1+: DA1.12 R2.2 R9.1 XP1.2 | length 40.9
  Top Layer w0.318: R9.1@85.5,58.67 85.5,58.97 86.201,59.672 86.269,59.672 86.494,59.897
  Top Layer w0.381: XP1.2@67,72.5 70.188,72.5 72.3,72.5 72.766,72.034 72.766,60.524 76.145,57.145 76.59,56.701 ; 76.595,56.695 76.818,56.472 86.352,56.472 86.575,56.695 86.575,57.596 86.11,58.061 85.81,58.061 85.5,58.37 R9.1@85.5,58.67 ; R2.2@83.5,58.5 R9.1@85.5,58.5 ; DA1.12@86.494,61.523 86.5,61.517 86.5,59.897
DAT_DA1-: DA1.13 R1.2 R9.2 XP1.1 | length 47
  Top Layer w0.318: DA1.13@87.764,61.523 87.764,59.707 R9.2@88.5,58.97
  Top Layer w0.381: XP1.1@65,72.5 66.125,73.625 72.603,73.625 73.27,72.958 v1(73.329,72.958) ; v1(72,71.25) 72,70.319 72.131,70.188 72.131,60.261 75.696,56.696 76.146,56.246 76.555,55.837 87,55.837 87.595,56.432 87.595,57.466 88.5,58.37 R9.2@88.5,58.5 ; R9.2@88.75,58.5 R1.2@90.5,58.5
  Bottom Layer w0.381: v1(72,71.25) 73.287,72.537 73.287,72.916 v1(73.329,72.958)
DAT_RgDU: DA3.3 DA36.5 DD1.14 | length 106
  Top Layer w0.254: DA3.3@120.06,70.5 120.06,72.968 124.439,77.348 135.725,77.348 v1(136.5,76.573) ; v1(149,76.5) 151.435,76.5 152.064,75.872 157.171,75.872 157.97,75.073 159.964,75.073 163.746,71.291 163.746,59.746 162.754,58.754 161.586,58.754 161.582,58.75 160.75,58.75 158.42,56.42 DD1.14@158.42,55.25 158.42,54.813 159.713,53.52 161.822,53.52 162.846,52.496 165.254,52.496 165.752,51.998 165.752,47.545 161.487,43.28 155.28,43.28 149.5,37.5 DA36.5@149.5,35.225
  Bottom Layer w0.254: v1(136.5,76.573) 136.537,76.536 148.963,76.536 v1(149,76.5)
DAT_RgDU+: DA3.12 R6.2 R11.1 XP1.8 | length 66.5
  Top Layer w0.381: XP1.8@67,66.5 67.176,66.324 67.176,65.866 69.869,63.173 69.869,59.739 70,59.608 70,59.442 75.392,54.05 75.66,54.05 75.77,53.94 108.25,53.94 ; 108.25,54 116.527,54 116.75,54.223 116.75,58.414 R11.1@116.493,58.67 ; R6.2@114.5,58.5 114.67,58.67 116.305,58.67 R11.1@116.493,58.67 ; DA3.12@117.5,60.75 117.482,60.732 117.482,59.959 116.493,58.97 R11.1@116.493,58.67
DAT_RgDU-: DA3.13 R5.2 R11.2 XP1.7 | length 100.3
  Top Layer w0.381: v1(76.175,53.2) 76.217,53.241 76.372,53.241 76.435,53.305 119.277,53.305 119.5,53.528 R11.2@119.5,58.25 ; DA3.13@118.75,60.75 118.75,60.681 118.883,60.548 118.952,60.548 119.493,60.007 R11.2@119.493,58.996 ; R11.2@119.5,58.99 119.99,58.5 R5.2@121.25,58.5
  Bottom Layer w0.381: XP1.7@65,66.5 62.46,66.5 61.5,67.46 61.5,74.5 63,76 74,76 76.5,73.5 76.5,53.532 76.175,53.207 v1(76.175,53.2)
ENB_DA1: DA5.6 DA17.6 | length 37.4
  Top Layer w0.254: v1(43.725,85.769) 43.725,86.574 DA17.6@43.725,87 ; v1(49,77.974) 49.5,77.474 49.5,73.968 50.338,73.131 50.338,64.332 49.825,63.819 49.825,55.967 50.969,54.823 51.53,54.823 51.722,55.014 52.607,55.014 DA5.6@52.682,55.09
  Bottom Layer w0.254: v1(43.725,85.769) 43.725,83.249 v1(49,77.974)
ENB_DA1n: DA5.2 XP1.17 | length 8.2
  Top Layer w0.254: DA5.2@58.106,53.82 60.207,53.82 60.486,53.541 62.041,53.541 XP1.17@65,56.5
ENB_DU: DA23.6 DA36.6 | length 73.2
  Top Layer w0.25: 148,24.75 147.75,25 147.75,27 148.5,27.75 148.5,29.203 148.734,29.436 149.29,29.436 149.5,29.646 DA36.6@149.5,30.775
  Top Layer w0.254: 148,24.689 148.562,24.127 157.127,24.127 173,40 173,56 170,59 169.75,59 169.5,59.25 167.149,59.25 167,59.399 167,65.1 ; 167.05,65.1 168.478,65.1 170.803,67.424 DA23.6@170.803,67.862
ENB_DUn: DA23.2 XP5.17 | length 69.7
  Top Layer w0.254: DA23.2@169.533,62.438 169.608,62.362 169.608,60.892 177.5,53 177.5,23 180.5,20 199.25,20 v1(200.5,21.25)
  Bottom Layer w0.254: v1(200.5,21.25) XP5.17@200.5,23.5
ENB_RgF: DA6.6 DD1.12 DD2.5 | length 87.7
  Top Layer w0.254: DD2.5@112.057,79.5 113.557,78 v1@134.22,78 ; v1(158.25,75.75) 160,75.75 164.25,71.5 164.25,59.463 163.037,58.25 161.795,58.25 160.96,57.415 DD1.12@160.96,55.25 ; v3(160.75,72.75) 160.817,72.683 160.817,68.683 DA6.6@160.893,68.608
  Bottom Layer w0.254: v1(134.365,78.145) 149.855,78.145 153,75 ; v1(158.25,75.75) 153.75,75.75 153,75 ; v3(160.75,72.75) 154.543,72.75 153.073,74.22 153.073,74.927 153,75
ENB_RgFn: DA6.2 XP1.18 | length 104.2
  Top Layer w0.254: v1@70.5,55.075 70.5,52.768 74.172,49.096 134.059,49.096 139.309,54.346 149.621,54.346 152.275,57 155.293,57 155.72,57.427 156.677,57.427 158.998,59.748 158.998,61.733 159.615,62.351 DA6.2@159.615,62.788
  Bottom Layer w0.254: XP1.18@67,56.5 69,56.5 v1(70.5,55)
ENS: DA9.6 DD3.1 | length 31.3
  Top Layer w0.254: DD3.1@50.35,46.83 50.85,46.83 51.573,46.107 51.573,31.75 ; 51.5,31.75 51.5,22.75 53.785,20.465 55.02,20.465 56.1,19.385 DA9.6@56.538,19.385
ENSn: DA9.2 XP1.16 | length 46.3
  Top Layer w0.254: DA9.2@61.962,18.115 65.615,18.115 68,20.5 68,49.25 69,50.25 69,56.5 XP1.16@67,58.5
F2: DA34.9 DD1.2 | length 25.3
  Top Layer w0.254: DA34.9@144.642,35.15 144.575,35.218 144.575,46.075 147,48.5 156.262,48.5 157.15,49.388 DD1.2@157.15,49.826
F3: DA34.1 DD1.3 | length 39.4
  Top Layer w0.254: v1(134.25,30.5) 135.024,29.726 DA34.1@135.752,29.726 ; v1(136.75,38.95) 136.75,40.1 147.59,50.94 152.193,50.94 152.219,50.965 157.718,50.965 158.42,50.263 DD1.3@158.42,49.826
  Bottom Layer w0.254: v1(134.25,30.5) 134.25,30.584 136.421,32.755 136.421,35.641 136.75,35.97 v1(136.75,38.95)
F4: DA34.16 DD1.4 | length 34.5
  Top Layer w0.254: v1(135.624,36.468) 135.688,36.404 135.688,35.214 DA34.16@135.752,35.15 ; v1(135.75,38.75) 135.75,39.9 147.35,51.5 158.453,51.5 159.69,50.263 DD1.4@159.69,49.826
  Bottom Layer w0.254: v1(135.624,36.468) 135.687,36.531 135.687,38.687 v1(135.75,38.75)
F5: DA29.9 DD1.5 | length 75.2
  Top Layer w0.254: DA29.9@101.555,28.288 101.555,28.726 102.134,29.304 102.134,29.577 v1(102.75,30.193) ; v1(102.75,37.752) 107.625,42.627 137.652,42.627 147.029,52.004 159.219,52.004 160.96,50.263 DD1.5@160.96,49.826
  Bottom Layer w0.254: v1(102.75,30.193) v1(102.75,37.752)
F6: DA29.8 DD1.6 | length 72.2
  Top Layer w0.254: v1(101.5,35.055) 101.527,35.027 101.527,33.74 DA29.8@101.555,33.712 ; v1(101.551,37.677) 107.005,43.131 137.306,43.131 146.683,52.508 159.985,52.508 162.23,50.263 DD1.6@162.23,49.826
  Bottom Layer w0.254: v1(101.5,35.055) 101.525,35.08 101.525,37.601 101.5,37.626 v1(101.551,37.677)
F7: DA29.1 DA29.16 DD1.7 | length 74.4
  Top Layer w0.254: DA29.16@110.445,28.288 110.445,28.725 109.945,29.226 109.945,32.775 110.445,33.274 DA29.1@110.445,33.712 110.472,33.74 110.472,35.222 v1(110.5,35.25) ; v1(111.993,45.25) 123.343,45.25 123.445,45.148 138.61,45.148 146.474,53.012 146.587,53.012 146.591,53.016 160.748,53.016 163.5,50.263 DD1.7@163.5,49.826
  Bottom Layer w0.254: v1(110.5,35.25) 110.5,35.8 111.722,37.022 111.722,44.979 v1(111.993,45.25)
GN: C87.1 C89.1 C91.2 C92.1 C93.2 DA35.5 R100.2 | length 29.4
  Top Layer w0.5: C91.2@210.775,62.176 C93.2@213.229,62.176 213.529,62.176 213.902,62.549 213.902,62.84 215.505,64.443 215.505,64.803 215.878,65.176 223.426,65.176 224,65.75 224,70.71 v1(222.31,72.4)
  Bottom Layer w0.5: C87.1@215.395,72.25 C92.1@217.731,72.25 220.31,72.25 C89.1@220.46,72.4 v1(222.31,72.4)
  other v2: 215.45,72.396
GND: C15.1 C22.1 C26.1 C27.1 C28.1 C29.1 C31.1 C32.1 C35.2 C36.1 C37.2 C38.1 C40.1 C42.2 C43.2 C44.2 C45.1 C46.1 C47.1 C50.1 C51.2 C60.2 C61.1 C62.1 C63.2 C67.1 C70.2 C71.1 C72.1 C79.1 C80.1 C81.2 C82.1 C84.1 C85.1 C88.2 C91.1 C94.1 C95.2 C97.2 C98.2 C99.1 DA1.4 DA1.5 DA1.8 DA2.4 DA2.5 DA2.8 DA3.4 DA3.5 DA3.8 DA4.4 DA4.5 DA4.8 DA5.5 DA6.5 DA7.4 DA8.8 DA9.5 DA10.5 DA13.1 DA13.3 DA14.1 DA15.1 DA17.2 DA17.3 DA19.5 DA19.11 DA20.3 DA21.3 DA23.5 DA24.8 DA25.4 DA25.5 DA25.8 DA26.4 DA26.5 DA26.8 DA27.2 DA27.3 DA27.6 DA27.7 DA29.5 DA31.4 DA32.6 DA34.5 DA36.3 DD1.8 DD1.13 DD2.7 DD3.7 KT1.1 KT2.1 KT3.1 R35.2 R37.1 R39.2 R45.1 R75.2 RP2.2 RP2.3 RP3.3 VD1.2 VD2.1 VD3.2 VD4.1 VD8.1 VD9.2 VD12.2 VD13.1 VD21.1 VD22.2 XP4.6 XP6.2 XP6.4 XP6.8 | length 335.3
  Top Layer w0.25: C50.1@17,22.4 17,22.7 17.3,23 v1(18.5,23) ; v1(17.5,62.773) C51.2@17.5,64 ; v1(24,49.5) C43.2@26,49.5 ; v1(28,40.543) C42.2@28,41.77 ; v1(32.392,49.642) 32.392,48.977 32.869,48.5 R45.1@34.5,48.5 ; C36.1@34.254,78.5 34.254,79.54 v1(34.254,79.727) ; C35.2@36.212,78.5 36.212,79.54 v1(36.212,79.727) ; C44.2@36.5,20 v1(39.25,20) ; v1(36.5,60.773) C45.1@36.5,62 ; C47.1@36.5,95.745 36.605,95.64 v1(36.605,94.475) DA20.3@38.788,94.475 ; v1(37.756,88.806) 37.851,88.806 38.157,88.5 DA17.2@39.275,88.5 ; 38.2,88.5 38.675,88.025 39.25,88.025 DA17.3@39.275,88 ; v1(42,40.098) 42.997,41.095 DA19.11@44.212,41.095 ; C37.2@42.5,55 42.2,55 41.825,55.375 41.825,56.575 v1(42.5,57.25) ; C46.1@46.5,98 47.54,98 v1(47.727,98) ; v1(48.268,98.745) 48.454,98.745 C38.1@49.495,98.745 ; C40.1@49.5,79.82 50.54,79.82 51,80.279 v1(51,80.32) ; DA21.3@53.943,85.788 53.943,86.791 v1(53.943,86.978) ; v1(81.605,32.501) 81.7,32.501 82,32.801 82.465,32.801 82.765,32.501 83.595,32.501 ; DA1.8@82.5,70.25 82.5,70.233 83.678,69.056 85.828,69.056 86.494,69.722 DA1.5@86.494,70.579 ; C79.1@83.595,31.501 83.595,32.501 ; C80.1@83.595,33.501 83.595,32.501 ; DA1.5@86.497,70.576 DA1.5@86.494,70.579 ; v1(87.5,43.5) 87.555,43.445 87.555,41.875 87.93,41.5 C71.1@88.23,41.5 ; DA1.4@87.764,70.579 DA1.5@86.494,70.579 ; v1(96.5,70.75) 96.595,70.75 96.765,70.579 DA2.8@98.192,70.579 ; v1(105,31.5) 105,31.595 105.365,31.96 DA29.5@105.365,33.712 ; v1(112.5,70.5) DA3.8@113.71,70.5 ; DD2.7@114.732,80 114.732,81.807 v1(114.75,81.825) ; v1(122.732,36.347) 122.732,36.252 123,35.984 C84.1@123,34.847 ; C27.1@128.946,100 128.997,99.948 132.448,99.948 132.5,100 132.552,99.948 133.5,99.948 ; v1(129.23,30.095) 129.325,30.095 129.573,29.847 130.288,29.847 C85.1@130.635,29.5 ; C26.1@129.5,105.5 129.5,105.375 129.875,105 133,105 133,104.594 133.5,104.094 133.5,99.948 ; v1(133.811,95.423) 133.811,96.098 DA13.3@133.811,97.16 133.811,99.948 ; VD2.1@135.445,99.948 133.811,99.948 ; VD1.2@135.445,102.448 135.445,100.02 VD2.1@135.465,100 ; v1(136.351,95.971) 136.351,96.158 DA13.1@136.351,97.16 ; DA34.5@140.832,29.726 140.832,29.289 143.89,26.231 143.97,26.231 144.318,25.883 v1(144.413,25.883) ; VD21.1@141.75,82.5 141.72,82.53 141.72,84.986 141.72,86.343 142.5,87.123 142.5,87.096 143.346,86.25 v1(144.5,86.25) ; v1(143.5,70.75) 143.595,70.75 143.789,70.556 DA8.8@145.38,70.556 ; v1(148.75,25.75) 149.4,25.75 ; C95.2@149.6,28.083 149.4,27.883 149.4,25.75 ; C97.2@150.25,25.5 150,25.75 149.4,25.75 ; DA36.3@150.5,35.225 150.5,36.187 150.795,36.483 151.92,36.483 152.696,35.706 C99.1@154.34,35.706 154.64,35.706 155.015,36.081 155.015,36.652 156.5,38.137 v1(156.5,40.75) ; 159,87 161.442,87 161.5,87.058 161.5,86.751 v1(162.25,86) ; VD3.2@161.566,87.125 VD4.1@164.494,87.125 ; VD9.2@176,83.627 181.109,83.627 181.486,83.25 C31.1@181.75,83.25 ; 195.5,62.081 195.5,60.116 DA24.8@195.556,60.06 ; 133.5,99.948 133.811,99.948
  Top Layer w0.254: v1(37.5,41.809) 37.566,41.875 37.842,41.875 38.332,42.365 DA19.5@38.788,42.365 ; v1(48.75,38.75) 49.21,39.21 DD3.7@50.35,39.21 ; v1(51.25,56.5) 51.344,56.5 51.484,56.36 DA5.5@52.682,56.36 ; v1(54.5,21.75) C15.1@54.5,23.5 ; C15.1@54.625,23.5 55.47,24.345 DA7.4@56.538,24.345 ; v1(54.75,35.25) 55.446,35.25 56.101,35.905 DA10.5@56.538,35.905 ; DA7.4@56.5,24.25 56.538,24.212 DA9.5@56.538,20.655 ; v1(80,71) 82.532,71 82.684,70.848 DA1.8@82.684,70.579 ; v1(102.002,72.932) DA2.5@102.002,70.579 DA2.4@103.272,70.579 ; DA14.1@110.351,94.66 111.133,94.66 111.279,94.514 v1(111.372,94.514) ; DA15.1@116.351,94.66 116.351,94.223 116.549,94.025 117.027,94.025 117.404,93.648 v1(117.497,93.648) ; DA3.5@117.52,70.5 DA3.4@118.79,70.5 118.77,70.52 118.77,73.48 v1(118.75,73.5) ; v1(128,70.75) 129.768,70.75 129.92,70.598 DA4.8@129.92,70.556 ; DA4.5@133.75,71 133.75,70.688 133.882,70.556 DA4.4@135,70.556 135,72.75 v1(134.5,73.25) ; R35.2@156.5,88.558 158.2,88.558 158.7,89.058 C28.1@159,89.058 159,87 ; DD1.13@159.69,55.25 159.72,55.28 159.72,56.5 v1(159.75,56.5) ; DA6.5@162.155,68.212 162.155,68.651 162.75,69.246 v1(162.75,70.5) ; v1(164.75,51.5) 164.76,51.49 164.76,49.836 DD1.8@164.77,49.826 ; C29.1@168.5,49.5 168.75,49.25 170.351,49.25 170.5,49.101 170.5,47.222 170.25,46.972 v1(170.25,45) ; v1(172,70) 172.036,69.964 172.036,67.898 172,67.862 172,67.604 DA23.5@172.255,67.349 ; v1(173.5,78.25) 173.25,78.5 R39.2@173.25,80 173.55,80 174.615,81.065 175.889,81.065 176.067,80.887 179.223,80.887 181.536,83.2 C31.1@181.75,83.2 ; DA27.7@180.538,100.365 DA27.6@180.538,101.635 185.635,101.635 DA27.3@185.75,101.75 ; v1(182,89.75) C67.1@182,91.345 ; DA27.2@185.962,100.365 DA27.3@185.962,101.635 186.507,101.635 186.749,101.877 187.627,101.877 C70.2@188,102.25 ; C70.2@188.25,102.25 188.558,102.558 188.558,104.808 189,105.25 194,105.25 195.393,103.857 196.136,103.857 DA31.4@196.212,103.781 199.219,103.781 199.75,103.25 199.75,90.5 198.532,89.282 197.782,89.282 C72.1@197.5,89 195.594,89 195.344,88.75 v1(195.25,88.75) ; v1(194.5,48) 194.5,45.572 DA25.8@194.652,45.42 ; DA25.4@195.286,40.34 DA25.5@195.286,41.61 193.679,41.61 193.01,42.278 193.01,44.752 193.758,45.5 193.775,45.483 194.589,45.483 DA25.8@194.652,45.42 ; DA25.8@195.286,45.42 DA25.8@194.652,45.42 ; 195.5,62.081 v1(195.5,62.5) ; DA26.4@195.657,70.25 195.657,71.368 195.506,71.52 DA26.5@194.907,71.52 ; DA26.5@195.657,71.52 DA26.5@194.907,71.52 ; v1(196.802,75.33) DA26.8@195.657,75.33 194.127,75.33 193.23,74.433 193.23,71.669 193.379,71.52 DA26.5@194.907,71.52 ; v1(207,84.5) 209.845,84.5 C82.1@209.895,84.55 ; v1@208.755,65 208.849,65 209.025,65.176 C91.1@210.775,65.176 ; C88.2@213.768,76.897 214.068,76.897 214.51,77.339 216.88,77.339 217.029,77.19 DA32.6@217.029,76.038 ; v1(214.704,75.441) v1@214.704,75.535 ; C81.2@221.495,83.65 221.5,83.645 v1(221.5,82.224)
  Top Layer w0.5: v1(168,76.935) 169.2,78.135 169.2,79.75 169.45,80 R37.1@169.75,80 ; v1(213.712,75.535) C88.2@213.712,76.841 ; C88.2@214.441,76.524 214.441,75.797 v1@214.704,75.535
  Top Layer w1: RP2.3@37.04,72.04 39.946,72.04 40.22,72.314 40.874,72.314 42.067,73.506 RP3.3@42.1,73.506
  Bottom Layer w0.254: 158.75,46.75 158.75,55.75 159.074,56.074 159.231,56.074 159.656,56.5 v1(159.75,56.5) ; 163.5,46.297 163.5,47.207 164.75,48.457 v1(164.75,51.5) ; 172.089,68.135 172.479,68.525
  Bottom Layer w0.5: 213.923,24.827 C60.2@219.415,24.827 219.956,24.827 220.836,23.947 XP6.4@225.209,23.947 ; 214.327,30.327 C62.1@219.415,30.327 221.429,30.327 XP6.8@225.209,34.107 ; XP6.2@225.076,19 XP6.2@225.209,18.867
  Bottom Layer w1: 213.5,19 XP6.2@225.076,19
  other v1: 208.75,65 41.171,76.046
GNDN: C9.1 C10.1 C17.1 C18.1 C52.1 DA1.9 DA2.9 DA3.9 DA4.9 DA5.4 DA6.4 DA7.5 DA8.9 DA9.4 DA10.4 DA23.4 DA24.9 DA25.9 DA26.9 KT4.1 R2.1 R4.1 R6.1 R8.1 R65.1 R66.1 XP1.3 XP1.12 XP1.15 XP5.8 XP5.11 XP5.14 | length 351.4
  Top Layer w0.7: KT4.1@57.5,70 60.5,70 ; DA5.4@58.106,56.36 58.494,56.36 58.519,56.385 58.519,56.59 58.929,57 C9.1@60.25,57 60.25,58 v1(60.5,58.25) ; DA9.4@61.962,20.655 62.225,20.655 62.25,20.68 62.25,22.5 ; DA7.5@61.962,24.345 62.057,24.25 62.25,24.25 62.25,22.5 ; DA10.4@62.375,35.905 63.78,35.905 64.375,36.5 C18.1@64.5,36.5 66.75,36.5 v1(66.75,38.25) ; XP1.15@65,58.5 64.885,58.615 64.461,58.615 64.326,58.75 61,58.75 v1(60.5,58.25) ; XP1.3@65,70.5 60.5,70.5 ; v1(66.75,22.5) C17.1@64.25,22.5 62.25,22.5 ; R2.1@80.5,58.75 80.5,60.35 v1(80.5,61.5) ; DA1.9@82.684,61.523 80.523,61.523 v1(80.5,61.5) ; R4.1@96.25,58.5 96.1,58.65 96.1,59.26 96,59.36 v1(96,61.5) 96.023,61.523 DA2.9@98.192,61.523 ; R6.1@111.5,58.5 111.5,60.35 v1(111.5,61.75) 113.651,61.75 113.71,61.691 DA3.9@113.71,61.444 ; R8.1@127.25,58.5 v1(127.25,61.25) 127.5,61.5 DA4.9@129.92,61.5 ; v1(144,59) 144.97,59 145.38,59.41 DA8.9@145.38,61.5 ; C10.1@162,60.5 162.15,60.65 162.15,61.085 162.25,61.185 v1(162.25,64.5) ; v1(172.073,60.852) DA23.4@172.073,62.05 ; DA23.4@172.073,62.438 DA23.4@172.073,62.05 ; C52.1@173.668,61.875 173.518,62.025 172.485,62.025 172.098,62.025 DA23.4@172.073,62.05 ; R66.1@182.5,77 185,77 v1(185.25,77.25) 185.25,75.389 185.309,75.33 DA26.9@186.601,75.33 ; R65.1@182.75,47.5 183,47.5 v1@185.07,47.5 ; 185.25,47.09 v1(185.25,47.5) ; v1(185.25,62) 185.25,60.509 185.66,60.099 186.461,60.099 DA24.9@186.5,60.06 ; 185.48,47.09 185.48,45.479 185.539,45.42 DA25.9@186.23,45.42 ; XP5.8@190.5,25.5 191.75,26.75 195.25,26.75 XP5.14@196.5,25.5 XP5.11@194.5,23.5 ; v1(60.5,58.25) 60.5,58.5 60.5,70 ; 60.5,70 60.5,70.5 ; 60.5,70.5 60.5,71.49 63.426,74.416 73.144,74.416 74.409,73.151 v1(74.409,62.5) 75.409,61.5 v1(80.5,61.5)
  Bottom Layer w0.7: v1(60.5,58.25) 60.5,53.525 65.25,48.775 65.25,39.75 v1(66.75,38.25) ; v1(66.75,22.5) v1(66.75,36.25) ; XP1.12@67,62.5 v1(74.409,62.5) ; v1(80.5,61.5) 80.552,61.448 80.552,58.5 92.25,58.5 92.608,58.858 96,58.858 ; v1(96,61.5) 96,58.858 ; v1(111.5,61.75) 111.5,58.858 ; v1(127.25,61.25) 127.25,59.25 ; 160.75,60.827 147.076,60.827 145.249,59 v1(144,59) 137.191,59 136.941,59.25 127.25,59.25 ; 160.826,60.826 162.25,60.826 ; v1(162.25,64.5) 162.25,60.826 ; 185.102,60.852 v1(172.073,60.852) 163.602,60.852 163.481,60.731 163.019,60.731 162.924,60.826 162.25,60.826 ; v1(185.25,77.25) v1(185.25,62) v1(185.25,47.5) 185.25,34 190.5,28.75 XP5.8@190.5,25.5 ; 96,58.858 111.5,58.858 ; 111.5,58.858 121.733,58.858 122.125,59.25 127.25,59.25
GNDZ: C21.1 DA11.5 DA12.3 R75.1 RP1.2 RP1.3 VD21.2 VD22.1 XP2.2 | length 87
  Top Layer w0.5: RP1.3@89.46,102 RP1.2@92,102 95.894,102 96.809,101.085 96.865,101.085 97.2,100.75 100.379,100.75 100.429,100.699 101.026,100.699 DA11.5@101.095,100.63 ; DA11.5@101.095,100.288 101.095,100.725 103.87,103.5 v1(105,103.5) ; v1(113.25,105.25) 116.25,105.25 XP2.2@118,107 119.5,105.5 121.795,105.5 123.795,107.5 126.507,107.5 128,106.007 128,104.993 127.75,104.743 127.75,101.13 127.5,100.88 127.5,100.5 127.176,100.176 127.176,100.095 125.081,98 DA12.3@125.081,95.736 125.109,95.708 125.109,94.573 125.23,94.452 125.23,92.09 126.597,90.723 127.072,90.723 127.074,90.721 127.737,90.721 127.74,90.723 131.66,90.723 133.851,88.532 v1(133.851,88.042) ; 136.907,82.5 136.907,84.986 v1@137.088,85.167 ; 137,82.5 VD21.2@139.719,82.5 ; v1(137.088,85.088) v1@137.088,85.167 ; R75.1@139.5,87.396 139.5,87.096 137.572,85.167 v1@137.088,85.167 ; VD21.2@139.719,82.554 VD22.1@139.719,84.986
  Bottom Layer w0.5: v1(105,103.5) 107.541,103.5 108.193,102.848 110.707,102.848 111,103.141 111,104.018 112.213,105.231 113.231,105.231 v1(113.25,105.25) ; v1(133.851,88.042) v1@136.907,84.986 ; v1@137,85 v1(137.088,85.088)
INF: KT5.1 R22.1 R40.1 XP2.1 | length 115.7
  Top Layer w0.254: R40.1@34.621,98.986 36.508,100.873 84.873,100.873 93.177,109.177 119.323,109.177 120.443,108.057 120.443,107.097 XP2.1@120.54,107 121.759,108.219 137.689,108.219 R22.1@137.986,107.923 138.063,108 142.492,108 142.754,107.738 143.512,107.738 KT5.1@143.75,107.5
LIMIT: DA10.6 DD3.13 | length 13.4
  Top Layer w0.254: DA10.6@56.538,34.635 56.885,34.635 58.25,36 58.25,45.411 58.101,45.56 DD3.13@56.56,45.56
LIMITn: DA10.2 XP1.20 | length 24.9
  Top Layer w0.254: DA10.2@61.962,33.365 61.525,33.365 60.823,34.067 60.823,36.196 61.994,37.367 62.828,37.367 63,37.539 63,49.5 67,53.5 XP1.20@67,54.5
LINE: C25.2 DA8.6 DA13.7 KT9.1 R24.2 R27.1 | length 42.6
  Top Layer w0.254: DA13.7@135.081,91.736 135.081,90.649 135.229,90.5 137.947,90.5 138.392,90.946 R27.1@138.446,90.946 ; C25.2@138.446,96.493 R24.2@138.446,93.948 R27.1@138.446,91.299 R27.1@138.446,90.946 ; KT9.1@144.25,80.5 144,80.5 143.25,79.75 143.25,77 146.25,74 ; KT9.1@144.25,80.75 136.75,80.75 136.713,80.713 135,82.427 135,85.086 138.446,88.532 R27.1@138.446,90.946 ; 146.246,73.996 147,73.241 147,72.334 147.92,71.414 DA8.6@147.92,70.556
LINE+: DA8.12 R17.1 XP1.14 | length 94
  Top Layer w0.381: XP1.14@67,60.5 73,54.5 73,52.3 73.351,51.949 74.49,50.81 132.418,50.81 137.152,55.544 146.544,55.544 148,57 R17.1@148,58.75 148,59.05 148.309,59.36 148.61,59.36 149.19,59.94 DA8.12@149.19,61.5